# Altium PCB ArduinoUnoShield.PcbDoc
Units mm, origin at the board's own origin, x right, y up, seen from the top; angles counter-clockwise.
Board outline 68.58 x 53.34 mm, 2 copper layers (Top Layer, Bottom Layer); 10 components, 30 nets, 62 pads, 0 vias.
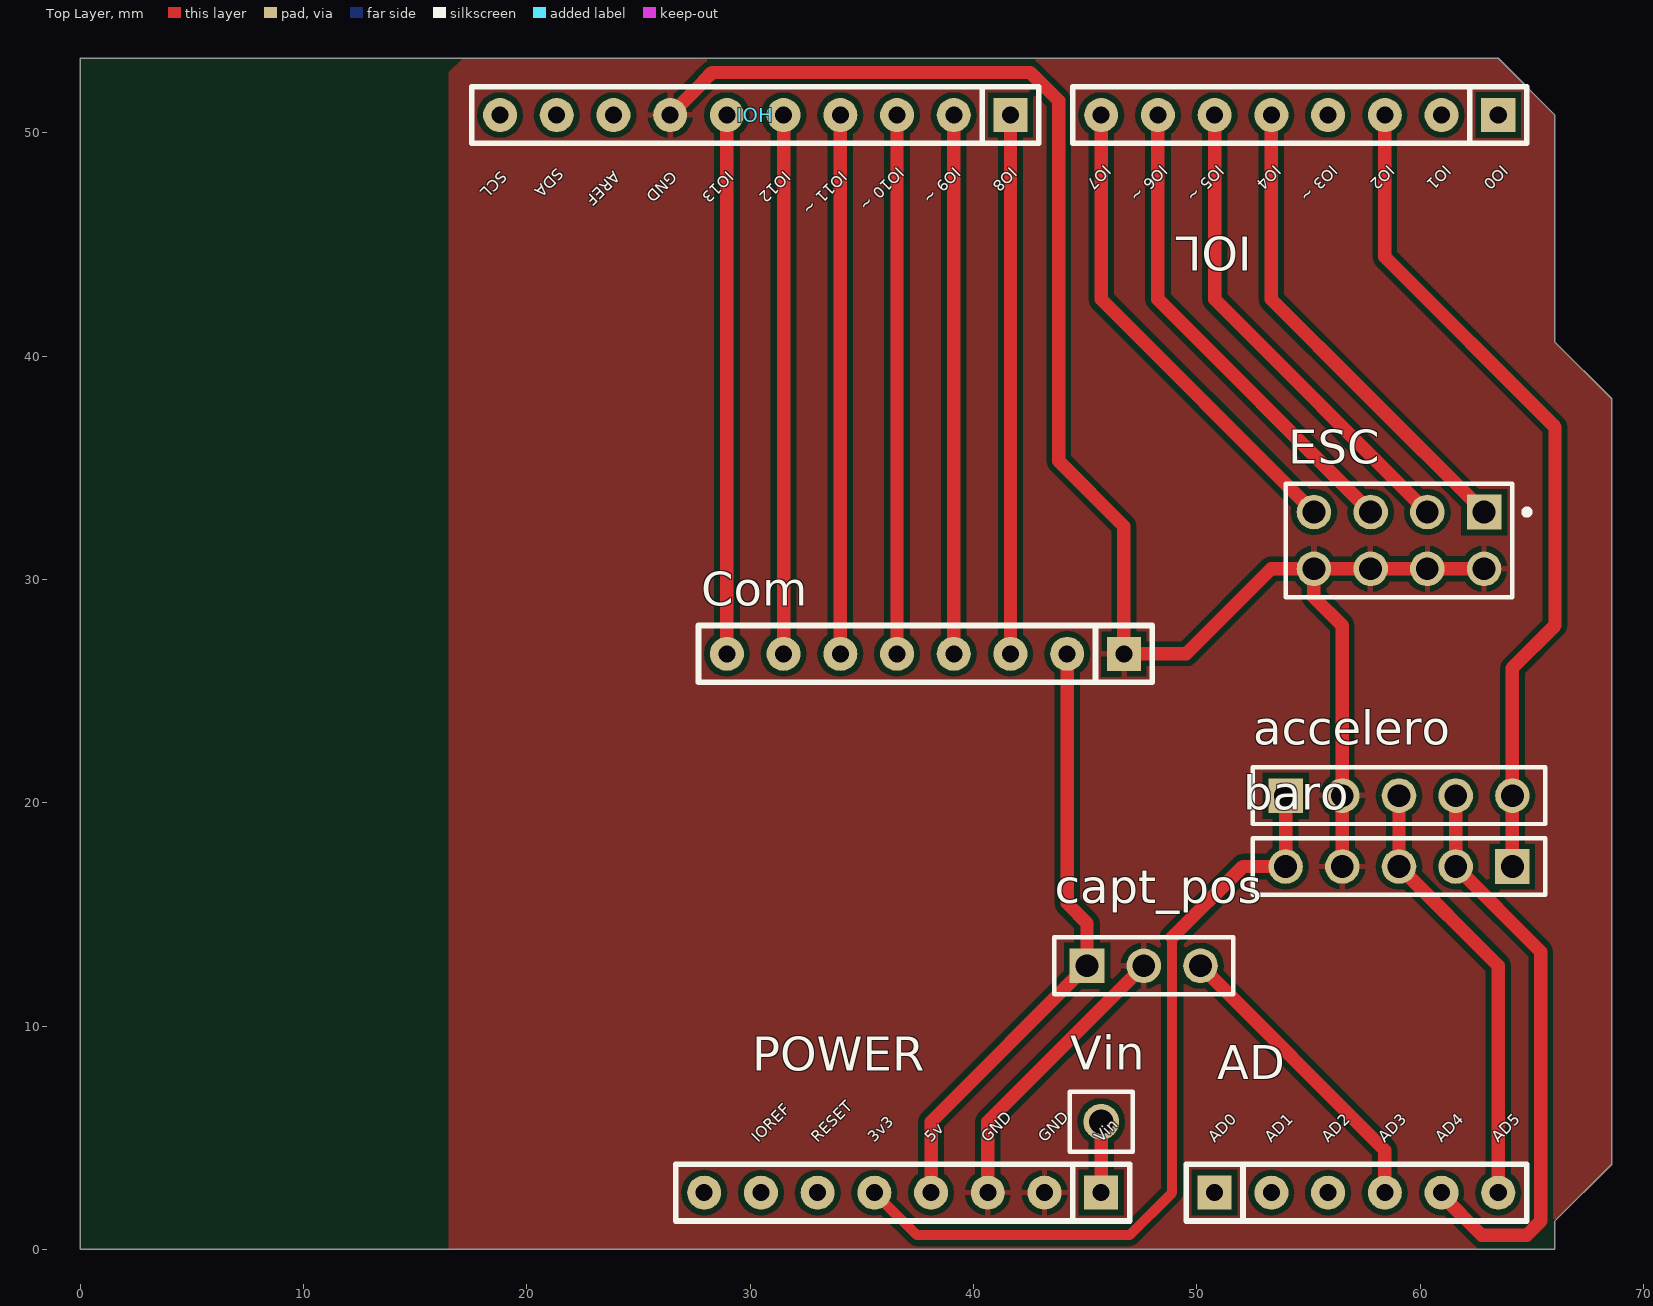
[diagram p0: Top Layer view]
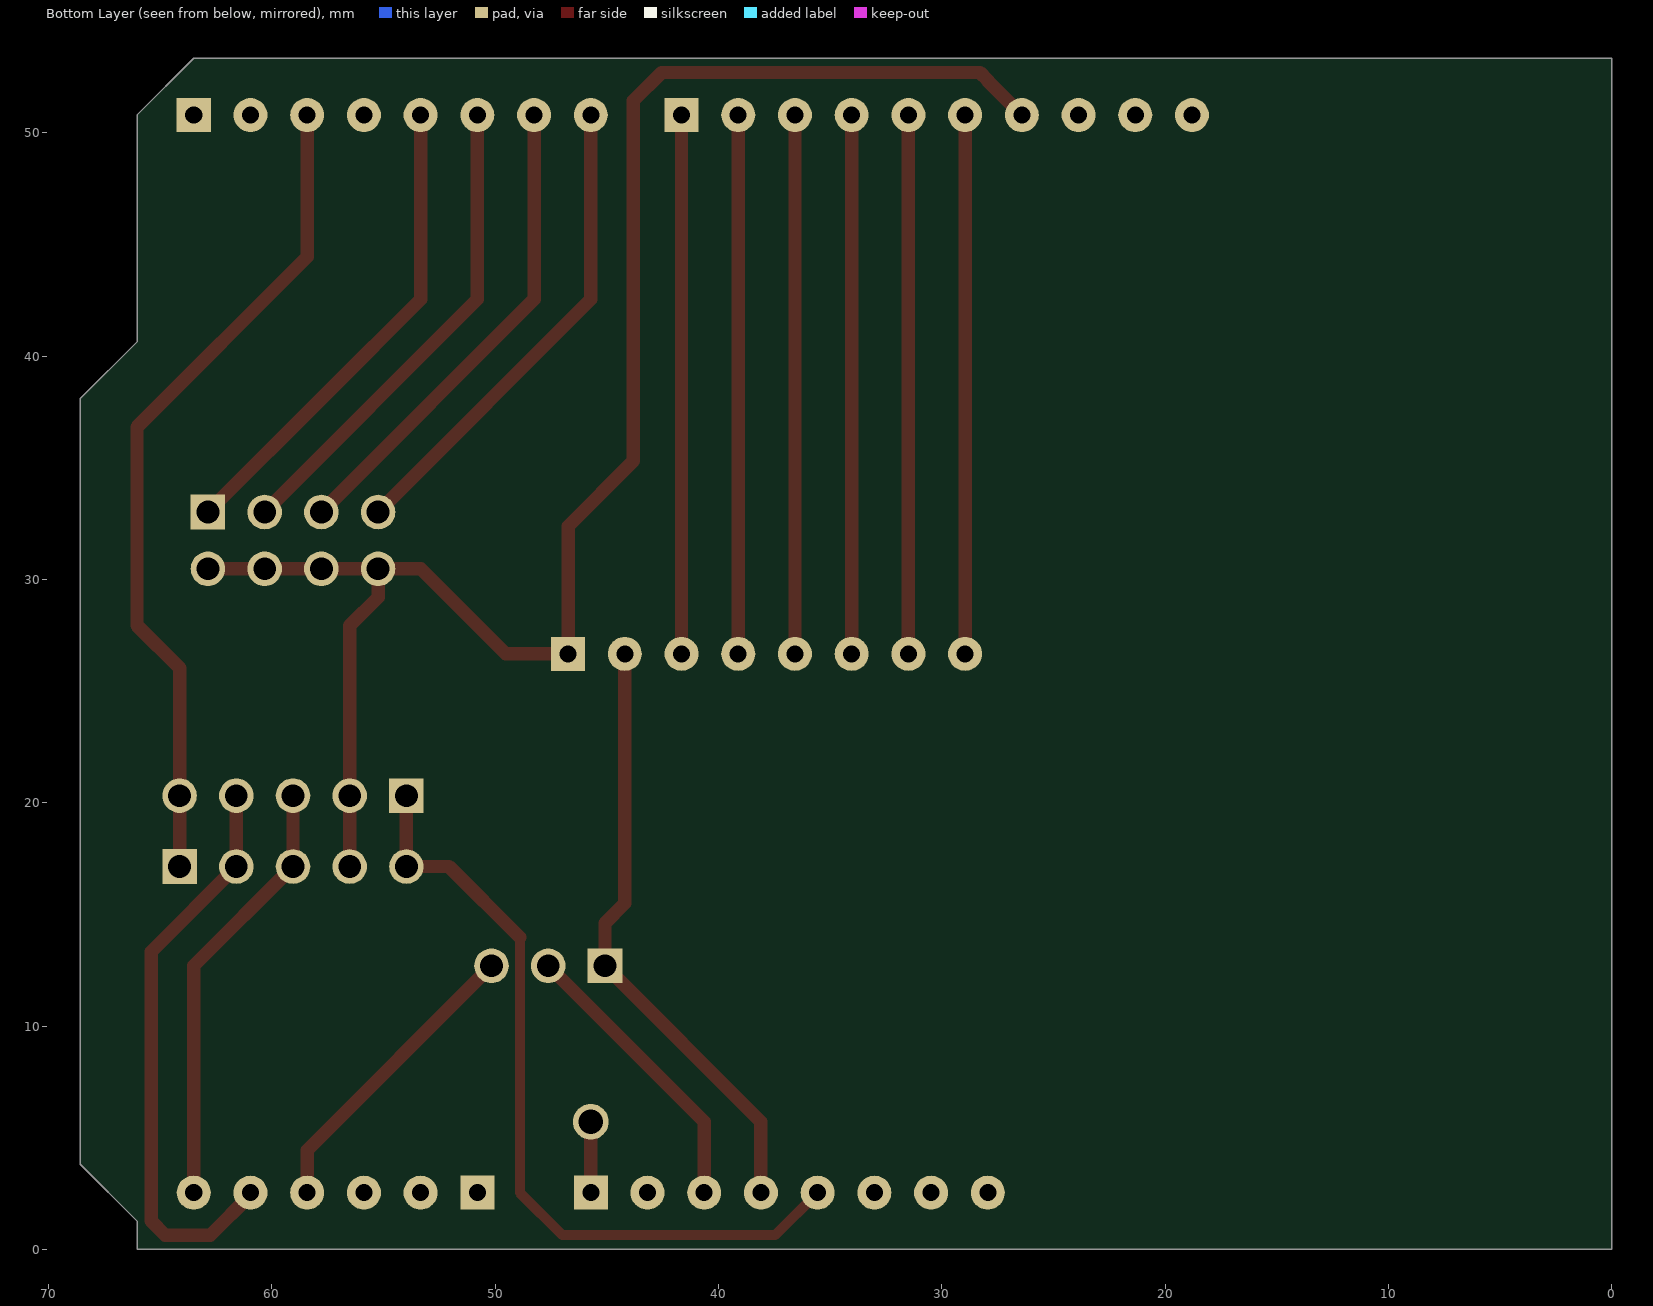
[diagram p1: Bottom Layer view, seen from below]

## Layer stack, top to bottom
Top Solder: solder mask 0.0102, Solder Resist, Dk 3.5
Top Layer: signal copper 0.0356
Dielectric1: dielectric 0.32, FR-4, Dk 4.8
Bottom Layer: signal copper 0.0356
Bottom Solder: solder mask 0.0102, Solder Resist, Dk 3.5

## Board outline
0,0 0,53.34 63.5,53.34 66.04,50.8 66.04,40.64 68.58,38.1 68.58,3.81 66.04,1.27 66.04,0

## Design rules (kind name [scope] priority, off if disabled: settings)
Clearance [All] p1: gap=0.254 ignorepadtopadclearanceinfootprint=FALSE except(0: Arc-Hole Track-Hole SMDPad-Hole THPad-Hole Via-Hole Fill-Hole Poly-Hole Region-Hole Text-Hole)
PolygonConnect [All] p1: connectstyle=Relief reliefconductorwidth=0.254 reliefentries=4 polygonreliefangle="90 Angle" airgapwidth=0.254
RoomDefinition ArduinoUnoShield [InComponentClass('ArduinoUnoShield')] p1: confinementstyle=ConfineOut formatcopy=TRUE lockcomponents=FALSE outline 69.723,-0.889 84.709,-0.889 84.709,10.922 69.723,10.922
RoutingVias [All] p1: holewidth=0.711 width=1.27 viastyle="Through Hole" minholewidth=0.711 minwidth=1.27 maxholewidth=0.711 maxwidth=1.27
SilkToSolderMaskClearance SilkscreenOverComponentPads [IsPad] p1: minsilkscreentomaskgap=0.254 clearancetoexposedcopper=TRUE
SolderMaskExpansion [All] p1: expansion=0.102
Width [All] p1: maxlimit=5 minlimit=0.4 preferedwidth=0.6
29 further rules are at their usual default settings.

## Components (designator, comment, footprint, x,y, rotation, side; value= is the part's Value field where it differs from the comment)
accelero "TSW-105-05-F-S" SMTC-TSW-105-05-X-S 53.975,20.32 r0 top
AD "AD" "Header 6x1 8.5mm" 50.8,2.54 r0 top locked
baro "TSW-105-05-F-S" SMTC-TSW-105-05-X-S 64.135,17.145 r180 top
capt_pos "TSW-103-07-T-S" SMTC-TSW-103-07-X-S 45.085,12.7 r0 top
Com "POWER_UNO" "Header 8x1 8.5mm" 46.736,26.67 r180 top
ESC "TSW-104-08-L-D" SMTC-TSW-104-08-L-D_V 59.055,31.75 r180 top
IOH "IOH" "Header 10x1 8.5mm" 41.656,50.8 r180 top locked
IOL "IOL" "Header 8x1 8.5mm" 63.5,50.8 r180 top locked
POWER "POWER_UNO" "Header 8x1 8.5mm" 45.72,2.54 r180 top locked
Vin "61300111121" 61300111121 45.72,5.715 r0 top

## Footprints (in the part's own frame and the unit in brackets; to place one, negate y for a bottom-side part, rotate by r counter-clockwise, add the part's x,y. Pads: shape width x height; smd on the part's side, far side on the other; paste and mask are expansions set on the pad)
61300111121 [mm] "Pin Header, pitch 2.54 mm, THT, Vertical, single row, 1p"
  round 1.6 hole 1.1: 1(0,0)
  silkscreen extent -1.42,-1.35 1.42,1.35, body extent -1.27,-1.27 1.27,1.27, height 8.57
"Header 6x1 8.5mm" [mil] "Stackable 6 pin header"
  rect 60x60 hole 30: 1(0,0)
  round 60 hole 30: 2(100,0) 3(200,0) 4(300,0) 5(400,0) 6(500,0)
  silkscreen extent -50,-50 550,50, body extent -50,-50 550,50, height 335
"Header 8x1 8.5mm" [mil] "Stackable 8 pin header"
  rect 60x60 hole 30: 1(0,0)
  round 60 hole 30: 2(100,0) 3(200,0) 4(300,0) 5(400,0) 6(500,0) 7(600,0) 8(700,0)
  silkscreen extent -50,-50 750,50, body extent -50,-50 750,50, height 335
"Header 10x1 8.5mm" [mil] "Stackable 10 pin header"
  rect 60x60 hole 30: 1(0,0)
  round 60 hole 30: 2(100,0) 3(200,0) 4(300,0) 5(400,0) 6(500,0) 7(600,0) 8(700,0) 9(800,0) 10(900,0)
  silkscreen extent -50,-50 950,50, body extent -50,-50 950,50, height 335
SMTC-TSW-103-07-X-S [mm] ".025 SQ Post Terminal Strip Assembly, 1x3 Pins, Vertical, 2.54mm Pitch, Male"
  rect 1.55x1.55 hole 1.02: 1(0,0)
  round 1.55 hole 1.02: 2(2.54,0) 3(5.08,0)
  silkscreen extent -1.46,-1.27 6.54,1.27, body extent -1.27,-1.27 6.35,1.27, height 8.38
SMTC-TSW-104-08-L-D_V [mm] "CONN, 8-Leads, Body 10.16x5.08mm, Pitch 2.54mm"
  rect 1.55x1.55 hole 1.02: 1(-3.81,-1.27)
  round 1.55 hole 1.02: 2(-3.81,1.27) 3(-1.27,-1.27) 4(-1.27,1.27) 5(1.27,-1.27) 6(1.27,1.27) 7(3.81,-1.27) 8(3.81,1.27)
  silkscreen extent -5.86,-2.54 5.08,2.54, body extent -5.08,-2.54 5.08,2.54, height 8.38
SMTC-TSW-105-05-X-S [mm] ".025 SQ Post Terminal Strip Assembly, 1x5 Pins, Vertical, 2.54mm Pitch, Male"
  rect 1.55x1.55 hole 1.02: 1(0,0)
  round 1.55 hole 1.02: 2(2.54,0) 3(5.08,0) 4(7.62,0) 5(10.16,0)
  silkscreen extent -1.46,-1.27 11.62,1.27, body extent -1.27,-1.27 11.43,1.27, height 5.21

## Part data
accelero baro: library part CMP-1024-00365-1, "0.025\" SQ Post Header, Through-hole, Vertical, -55 to 125 degC, 2.54 mm Pitch, 5-Pin, Male, RoHS"
capt_pos: library part CMP-1024-00332-1, "0.025\" SQ Post Header, Through-hole, Vertical, -55 to 105 degC, 2.54 mm Pitch, 3-Pin, Male, RoHS"
ESC: library part CMP-1681-00006-4, "Male Header, Pitch 2.54 mm, 2 x 4 Position, Height 8.38 mm, Tail Length 5.08 mm, -55 to 125 degC, RoHS, Bulk"
Vin: library part CMP-1502-01058-1, "THT Vertical Pin Header WR-PHD, Pitch 2.54 mm, Single Row, 1 pins"

## Nets (pads, with @x,y where several pads share a name; then routed paths per layer and width w, separated by ;. In a path a pad name is that pad's centre, name@x,y a point inside that pad or via, vN(x,y) a via of type N, cw(c..) or ccw(c..) an arc to the next point about the centre after c; other vN are vias at no path point)
3V3: accelero.1 baro.5 POWER.5 | length 35.9
  Top Layer w0.45: POWER.5 37.465,0.635 46.99,0.635 48.895,2.54 48.895,13.97
  Top Layer w0.6: 48.895,13.97 52.07,17.145 baro.5 accelero.1
5V: capt_pos.1 Com.2 POWER.4 | length 27.4
  Top Layer w0.6: POWER.4 38.1,5.715 capt_pos.1 45.085,14.605 44.196,15.494 Com.2
12V: 
AD0: AD.1
AD1: AD.2
AD2: AD.3
AD3: AD.4 capt_pos.3 | length 13.6
  Top Layer w0.6: capt_pos.3 58.42,4.445 AD.4
AD4: accelero.4 AD.5 baro.2 | length 26.2
  Top Layer w0.254: AD.5@60.96,2.437 AD.5
  Top Layer w0.6: AD.5@60.96,2.437 62.762,0.635 64.77,0.635 65.405,1.27 65.405,13.335 baro.2 accelero.4
AD5: accelero.3 AD.6 baro.3 | length 19.6
  Top Layer w0.6: accelero.3 baro.3 63.5,12.7 AD.6
AREF: IOH.8
GND: accelero.2 baro.4 capt_pos.2 Com.1 ESC.2 ESC.4 ESC.6 ESC.8 IOH.7 POWER.2 POWER.3 | length 89.3
  Top Layer w0.6: IOH.7 27.94,52.324 27.94,52.354 28.291,52.705 42.545,52.705 43.815,51.435 43.815,35.306 46.736,32.385 Com.1 49.53,26.67 53.34,30.48 ESC.8 ; POWER.3 40.64,5.715 capt_pos.2 ; baro.4 accelero.2 56.515,27.94 55.245,29.21 ESC.8 ; ESC.2 ESC.4 ESC.6 ESC.8
IO0: IOL.1
IO1: IOL.2
IO2: accelero.5 baro.1 IOL.3 | length 37.6
  Top Layer w0.6: IOL.3 58.42,44.45 66.04,36.83 66.04,27.94 64.135,26.035 accelero.5 baro.1
IO3: IOL.4
IO4: ESC.1 IOL.5 | length 21.7
  Top Layer w0.6: IOL.5 53.34,42.545 57.468,38.417 ESC.1
IO5: ESC.3 IOL.6 | length 21.7
  Top Layer w0.6: IOL.6 50.8,42.545 ESC.3
IO6: ESC.5 IOL.7 | length 21.6
  Top Layer w0.254: ESC.5@57.468,33.02 ESC.5@57.468,33.337
  Top Layer w0.6: IOL.7 48.26,42.545 ESC.5@57.468,33.337
IO7: ESC.7 IOL.8 | length 21.6
  Top Layer w0.254: ESC.7@54.927,33.02 ESC.7@54.927,33.337
  Top Layer w0.6: IOL.8 45.72,42.545 ESC.7@54.927,33.337
IO8: Com.3 IOH.1 | length 24.1
  Top Layer w0.6: Com.3 IOH.1
IO9: Com.4 IOH.2 | length 24.1
  Top Layer w0.6: Com.4 IOH.2
IO10: Com.5 IOH.3 | length 24.1
  Top Layer w0.6: Com.5 IOH.3
IO11: Com.6 IOH.4 | length 24.1
  Top Layer w0.6: Com.6 IOH.4
IO12: Com.7 IOH.5 | length 24.1
  Top Layer w0.6: Com.7 IOH.5
IO13: Com.8 IOH.6 | length 24.1
  Top Layer w0.6: Com.8 IOH.6
IOREF: POWER.7
RESET: POWER.6
SCL: IOH.10
SDA: IOH.9
VIN: POWER.1 Vin.1 | length 3.2
  Top Layer w0.6: POWER.1 Vin.1
pads on no net: POWER.8

## Polygon pours and split planes (outlines as drawn)
GND on Top Layer (solid, pour order 4): 17.145,53.34 16.51,52.705 16.51,0 66.04,0 66.04,1.27 68.58,3.81 68.58,38.1 66.04,40.64 66.04,50.8 63.5,53.34
no net on Top Layer (solid, pour order 0): 17.145,53.34

## Silkscreen, mask and mechanical layers (free items; w line width, h text height)
Top Overlay:
  text "IO7" at 45.847,48.588 h0.51 r225
  text "IO6 ~" at 48.387,48.588 h0.51 r225
  text "IO5 ~" at 50.927,48.588 h0.51 r225
  text "IO4" at 53.467,48.588 h0.51 r225
  text "IO3 ~" at 56.007,48.588 h0.51 r225
  text "IO2" at 58.547,48.588 h0.51 r225
  text "IO1" at 61.087,48.588 h0.51 r225
  text "IO0" at 63.627,48.588 h0.51 r225
  text "IO10 ~" at 36.576,48.514 h0.51 r225
  text "IO9 ~" at 39.116,48.514 h0.51 r225
  text "IO8" at 41.656,48.514 h0.51 r225
  text "SDA" at 21.336,48.461 h0.51 r225
  text "SCL" at 18.796,48.334 h0.51 r225
  text "AREF" at 23.876,48.334 h0.51 r225
  text "GND" at 26.416,48.334 h0.51 r225
  text "IO13" at 28.956,48.334 h0.51 r225
  text "IO12" at 31.496,48.334 h0.51 r225
  text "IO11 ~" at 34.036,48.334 h0.51 r225
  text "IOREF" at 30.353,4.752 h0.51 r45
  text "RESET" at 33.02,4.752 h0.51 r45
  text "3v3" at 35.56,4.752 h0.51 r45
  text "5v" at 38.1,4.752 h0.51 r45
  text "GND" at 40.64,4.752 h0.51 r45
  text "GND" at 43.18,4.752 h0.51 r45
  text "Vin" at 45.72,4.752 h0.51 r45
  text "AD0" at 50.8,4.752 h0.51 r45
  text "AD1" at 53.34,4.752 h0.51 r45
  text "AD2" at 55.88,4.752 h0.51 r45
  text "AD3" at 58.42,4.752 h0.51 r45
  text "AD4" at 60.96,4.752 h0.51 r45
  text "AD5" at 63.5,4.752 h0.51 r45
  text "RESET" at 32.893,-63.881 h0.51 r45
  text "3v3" at 35.433,-63.881 h0.51 r45
  text "5v" at 37.973,-63.881 h0.51 r45
  text "GND" at 40.513,-63.881 h0.51 r45
  text "GND" at 43.053,-63.881 h0.51 r45
  text "Vin" at 45.593,-63.881 h0.51 r45
Mechanical 1:
  lines w0.127: 66.04,1.27 62.333,1.27 61.063,0 0,0 0,53.34 63.5,53.34 66.04,50.8 66.04,40.64 68.58,38.1 68.58,3.81